# Altium PCB PCB1.PcbDoc
Units mm, origin at the board's own origin, x right, y up, seen from the top; angles counter-clockwise.
Board outline 41 x 58.5 mm, 2 copper layers (Top Layer, Bottom Layer); 36 components, 22 nets, 140 pads, 20 vias.
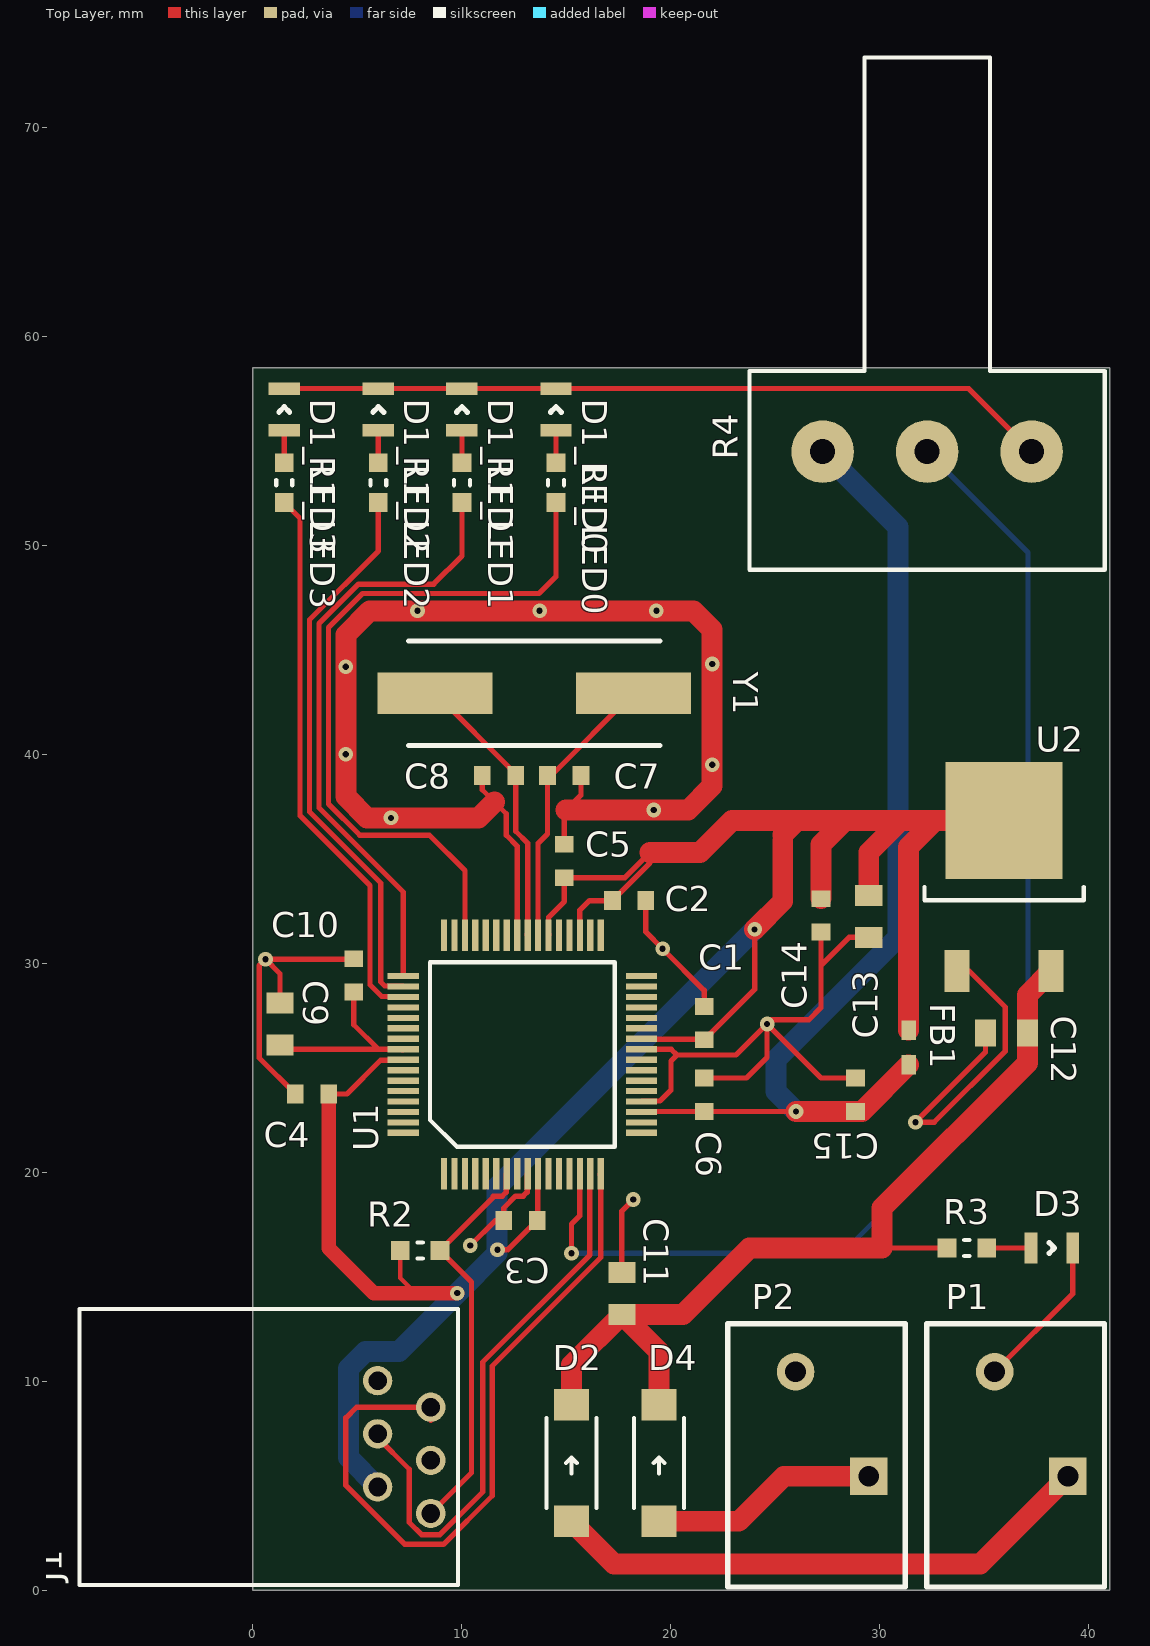
[diagram p0: Top Layer view]
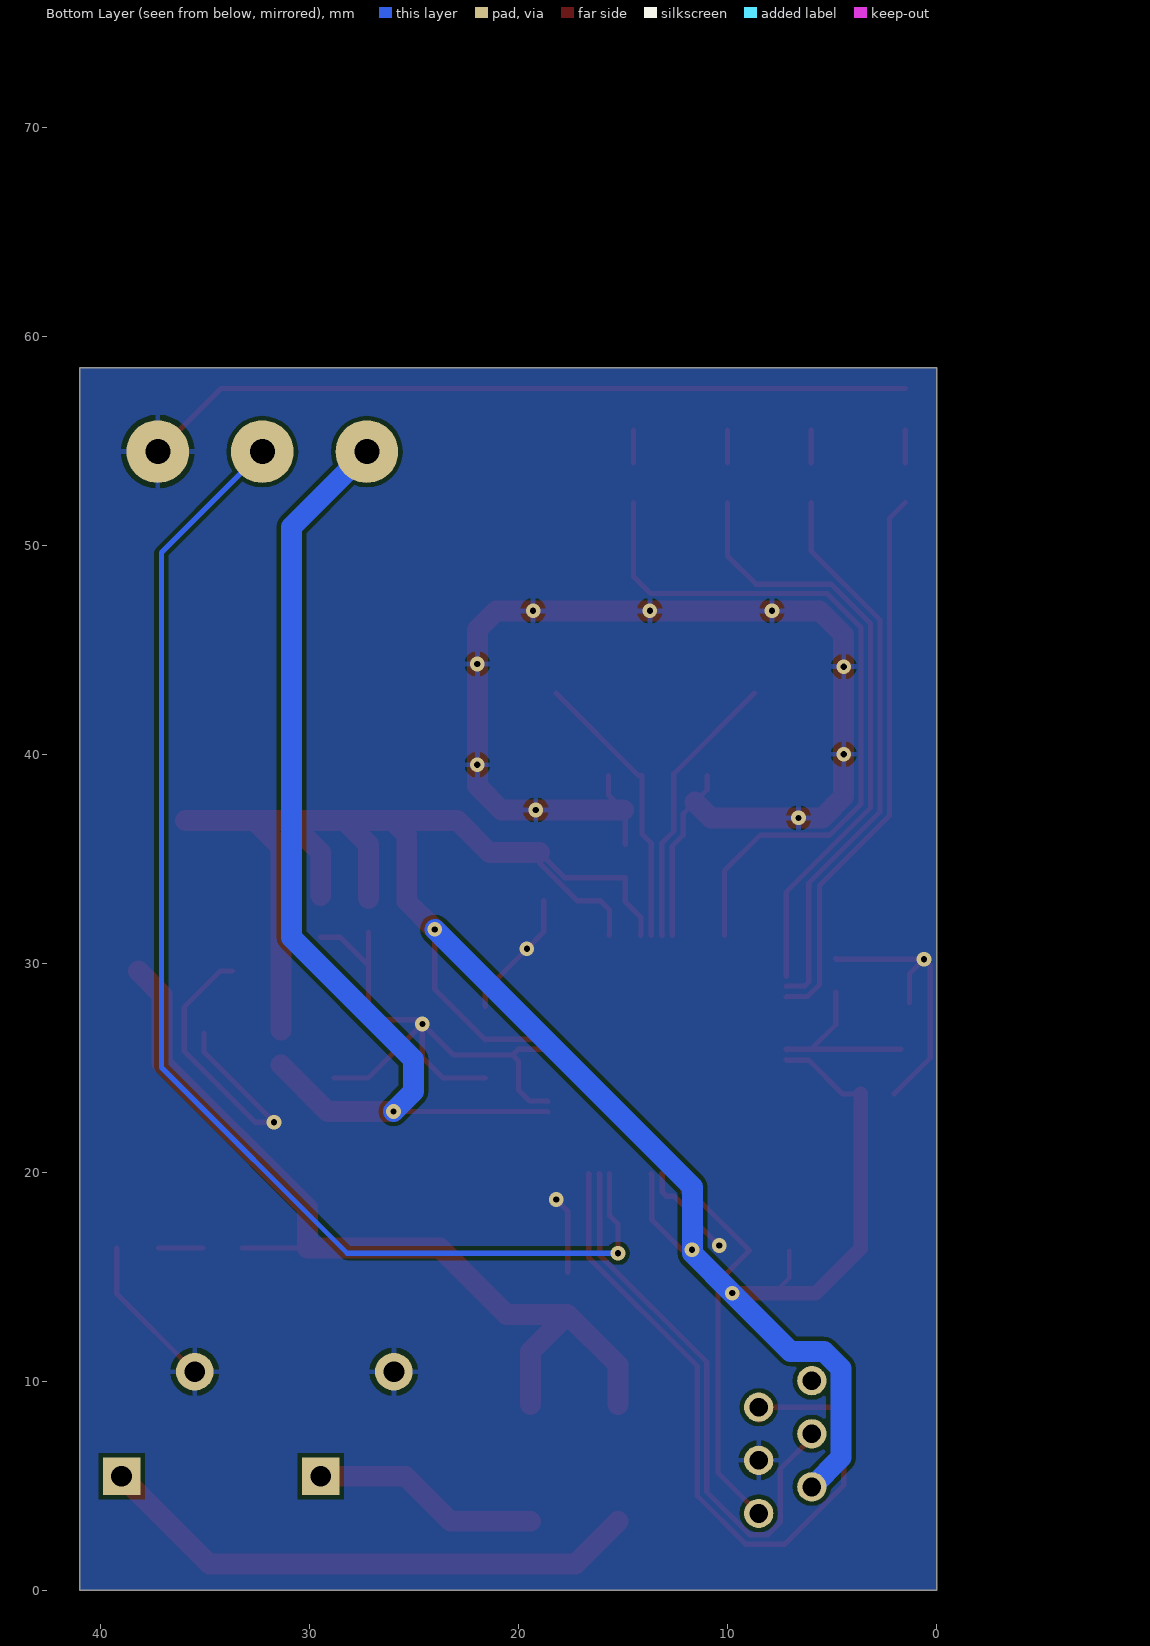
[diagram p1: Bottom Layer view, seen from below]

## Layer stack, top to bottom
Top Solder: solder mask 0.0102, Solder Resist, Dk 3.5
Top Layer: signal copper 0.0356
Dielectric 1: dielectric 0.32, FR-4, Dk 4.8
Bottom Layer: signal copper 0.0356
Bottom Solder: solder mask 0.0102, Solder Resist, Dk 3.5

## Board outline
0,0 41,0 41,58.5 0,58.5

## Design rules (kind name [scope] priority, off if disabled: settings)
Clearance [All] p1: gap=0.2
HoleSize [All] p1: absolutevalues=TRUE maxlimit=5 minlimit=0.3 maxpercent=80.000 minpercent=20.000
PolygonConnect [All] p1: connectstyle=Relief reliefconductorwidth=0.254 reliefentries=4 polygonreliefangle="90 Angle" airgapwidth=0.254
RoutingVias [All] p1: holewidth=0.3 width=0.7 viastyle="Through Hole" minholewidth=0.3 minwidth=0.7 maxholewidth=1 maxwidth=1.4
SilkToBoardRegionClearance [All] p1 off:
SolderMaskExpansion [All] p1: expansion=0.102
UnpouredPolygon [All] p1: allowunpoured=FALSE
Width [All] p1: maxlimit=5 minlimit=0.2 preferedwidth=0.2
27 further rules are at their usual default settings.

## Classes and differential pairs
channel class led: LED0 LED1 LED2 LED3
net class LED[0..3]: LED0 LED1 LED2 LED3
component class TP2: R4
component class POWER: C11 C12 C13 C14 C15 D2 D3 D4 FB1 P1 P2 R3 U2
component class PIC: C1 C2 C3 C4 C5 C6 C7 C8 C9 C10 J1 R2 U1 Y1
component class LED3: D1_LED3 R1_LED3
component class LED2: D1_LED2 R1_LED2
component class LED1: D1_LED1 R1_LED1
component class LED0: D1_LED0 R1_LED0

## Components (designator, comment, footprint, x,y, rotation, side; value= is the part's Value field where it differs from the comment)
C1 "100nF" CAPC1608N 21.59,27.94 r270 top
C2 "100nF" CAPC1608N 18.8,33 r180 top
C3 "100nF" CAPC1608N 12,17.7 r0 top
C4 "100nF" CAPC1608N 2.032,23.749 r0 top
C5 "100nF" CAPC1608N 14.9,35.7 r270 top
C6 "100nF" CAPC1608N 21.59,24.511 r270 top
C7 "20pF" CAPC1608N 14.097,38.989 r0 top
C8 "20pF" CAPC1608N 12.573,38.989 r180 top
C9 "10uF" CAPC2012N 1.3,28.1 r270 top
C10 "1uF" CAPC1608N 4.826,30.226 r270 top
C11 "10uF" CAPC2012N 17.653,13.208 r90 top
C12 "10uF" CAPC2012N 35.052,26.67 r0 top
C13 "10uF" CAPC2012N 29.464,31.242 r90 top
C14 "1uF" CAPC1608N 27.178,31.496 r90 top
C15 "100nF" CAPC1608N 28.829,24.511 r270 top
D1_LED0 "Green Led" "LED 0805" 14.5,56.5 r90 top (schematic designator D1)
D1_LED1 "Green Led" "LED 0805" 10,56.5 r90 top (schematic designator D1)
D1_LED2 "Green Led" "LED 0805" 6,56.5 r90 top (schematic designator D1)
D1_LED3 "Green Led" "LED 0805" 1.5,56.5 r90 top (schematic designator D1)
D2 "GF1A" SMA/DO-214AC_21 15.24,6.096 r90 top
D3 "Green LED" "LED 0805" 38.227,16.383 r0 top
D4 "GF1A" SMA/DO-214AC_21 19.431,6.096 r90 top
FB1 "600r" INDC1608AN 31.369,26.797 r270 top
J1 "CON6" RJ12_90 7.239,6.858 r90 top
P1 "12V Main" PHOENIX_1985195 38.989,5.461 r0 top
P2 "12V Battery" PHOENIX_1985195 29.464,5.461 r0 top
R1_LED0 "Res1" RESC1608N 14.5,53 r270 top (schematic designator R1)
R1_LED1 "Res1" RESC1608N 10,53 r270 top (schematic designator R1)
R1_LED2 "Res1" RESC1608N 6,53 r270 top (schematic designator R1)
R1_LED3 "Res1" RESC1608N 1.5,53 r270 top (schematic designator R1)
R2 "4.7k" RESC1608N 8.001,16.256 r180 top
R3 "470r" RESC1608N 34.163,16.383 r180 top
R4 "1K" PDB181-K415K-102A2 32.258,54.483 r0 top
U1 "PIC32MX764F128H-I/PT" QFP50P1200X1200X120-64 9.144,19.939 r90 top
U2 "AP1117" TD03B_N 35.941,36.83 r0 top
Y1 "8MHz" XTAL139X50X45 13.462,42.926 r0 top

## Footprints (in the part's own frame and the unit in brackets; to place one, negate y for a bottom-side part, rotate by r counter-clockwise, add the part's x,y. Pads: shape width x height; smd on the part's side, far side on the other; paste and mask are expansions set on the pad)
CAPC1608N [mm]
  rect 0.8x0.9 smd: 1(0,0) 2(1.6,0)
CAPC2012N [mm]
  rect 1x1.3 smd: 1(0,0) 2(2,0)
INDC1608AN [mm]
  rect 0.95x0.7 smd: 1(0,0) 2(1.65,0)
"LED 0805" [mm] "Typical INFRARED GaAs LED"
  rect 0.6x1.5 smd: 1(-1,0) 2(1,0)
  silkscreen extent -0.13,-0.25 0.13,0.25
PDB181-K415K-102A2 [mm]
  round 3 hole 1.2: 1(-5,0) 2(0,0) 3(5,0)
  silkscreen extent -8.5,-5.65 8.5,18.85
PHOENIX_1985195 [mm]
  rect 1.8x1.8 hole 1: 1(0,0)
  round 1.8 hole 1: 2(-3.5,5)
  silkscreen extent -6.75,-5.3 1.75,7.3
QFP50P1200X1200X120-64 [mm]
  rect 1.5x0.3 smd: 1(0,0) 2(0,-0.5) 3(0,-1) 4(0,-1.5) 5(0,-2) 6(0,-2.5) 7(0,-3) 8(0,-3.5) 9(0,-4) 10(0,-4.5) 11(0,-5) 12(0,-5.5) 13(0,-6) 14(0,-6.5) 15(0,-7) 16(0,-7.5) 33(11.4,-7.5) 34(11.4,-7) 35(11.4,-6.5) 36(11.4,-6) 37(11.4,-5.5) 38(11.4,-5) 39(11.4,-4.5) 40(11.4,-4) 41(11.4,-3.5) 42(11.4,-3) 43(11.4,-2.5) 44(11.4,-2) 45(11.4,-1.5) 46(11.4,-1) 47(11.4,-0.5) 48(11.4,0)
  rect 0.3x1.5 smd: 17(1.95,-9.45) 18(2.45,-9.45) 19(2.95,-9.45) 20(3.45,-9.45) 21(3.95,-9.45) 22(4.45,-9.45) 23(4.95,-9.45) 24(5.45,-9.45) 25(5.95,-9.45) 26(6.45,-9.45) 27(6.95,-9.45) 28(7.45,-9.45) 29(7.95,-9.45) 30(8.45,-9.45) 31(8.95,-9.45) 32(9.45,-9.45) 49(9.45,1.95) 50(8.95,1.95) 51(8.45,1.95) 52(7.95,1.95) 53(7.45,1.95) 54(6.95,1.95) 55(6.45,1.95) 56(5.95,1.95) 57(5.45,1.95) 58(4.95,1.95) 59(4.45,1.95) 60(3.95,1.95) 61(3.45,1.95) 62(2.95,1.95) 63(2.45,1.95) 64(1.95,1.95)
  silkscreen extent 1.28,-8.16 10.11,0.67
RESC1608N [mm]
  rect 0.9x0.9 smd: 1(-0.95,0) 2(0.95,0)
  silkscreen extent -0.13,-0.38 0.13,0.38
RJ12_90 [mm] "RJ11"
  round 1.4 hole 0.9: 1(-3.175,-1.27) 2(-1.905,1.27) 3(-0.635,-1.27) 4(0.635,1.27) 5(1.905,-1.27) 6(3.175,1.27)
  silkscreen extent -6.6,-2.57 6.6,15.53
SMA/DO-214AC_21 [mm]
  rect 1.52x1.68 smd: 1(-2.79,0) 2(2.79,0)
  silkscreen extent -2.15,-1.2 2.15,1.2
TD03B_N [mm] "1A LDO, 18V input, DPAK"
  rect 1.2x2 smd: 1(-2.25,-7.2) 3(2.25,-7.2)
  rect 5.6x5.6 smd: 4(0,0)
  silkscreen extent -3.81,-3.81 3.81,-3.17
XTAL139X50X45 [mm] "Crystal Oscillator"
  rect 5.5x2 smd: 1(-4.75,0) 2(4.75,0)
  silkscreen extent -6,-2.5 6,2.5

## Part data
C1 C2 C3 C4 C5 C6 C7 C8 C9 C10 C11 C12 C13 C14 C15: library part Cap, "Capacitor"
D1_LED0 D1_LED1 D1_LED2 D1_LED3 D3: library part LED0, "Typical INFRARED GaAs LED"
D2 D4: library part Diode, "Default Diode"
FB1: library part Inductor, "Inductor"
P1 P2: library part "Header 2", "Header, 2-Pin"
R1_LED0 R1_LED1 R1_LED2 R1_LED3: "Resistor"
R2 R3: library part Res1, "Resistor"
R4: library part RPot, "Potentiometer"
U1: library part PIC32MX764F128H, "PIC32MX764F128H"
U2: "1A LDO, 18V input, DPAK"
Y1: library part XTAL, "Crystal Oscillator"

## Via types
v1: diameter 0.7, hole 0.3, Top Layer to Bottom Layer, 20 vias

## Nets (pads, with @x,y where several pads share a name; then routed paths per layer and width w, separated by ;. In a path a pad name is that pad's centre, name@x,y a point inside that pad or via, vN(x,y) a via of type N, cw(c..) or ccw(c..) an arc to the next point about the centre after c; other vN are vias at no path point)
ALIM: D2.1 P1.1 | length 26.3
  Top Layer w1: D2.1 17.276,1.27 34.798,1.27 P1.1
BATTERY: D4.1 P2.1 | length 10.9
  Top Layer w1: D4.1 23.245,3.306 25.4,5.461 P2.1
GND: C1.1 C2.1 C3.1 C4.1 C5.1 C6.1 C7.2 C8.2 C9.1 C10.1 C11.2 C12.1 C13.1 C14.1 C15.1 D1_LED0.2 D1_LED1.2 D1_LED2.2 D1_LED3.2 D3.2 J1.3 P1.2 P2.2 R4.3 U1.9 U1.20 U1.25 U1.41 U2.1 | length 180.7
  Top Layer w0.254: C9.1 1.3,29.5 v1(0.6,30.2) ; D1_LED3.2 D1_LED2.2 D1_LED1.2 D1_LED0.2 34.241,57.5 R4.3 ; C4.1 0.3,25.481 0.3,29.9 v1(0.6,30.2) ; C10.1 4.8,30.2 v1(0.6,30.2) ; v1(10.4,16.5) 11.6,17.7 C3.1 12,18.291 12.571,18.862 12.929,18.862 13.121,19.054 13.121,19.916 U1.9 ; C8.2 10.973,38.303 11.557,37.719 12.119,37.157 12.119,36.134 12.644,35.609 U1.41 ; C5.1 14.9,37.252 14.986,37.338 15.697,38.049 C7.2 ; 16.7,37.338 16.764,37.274 ; C11.2 17.653,18.153 v1(18.2,18.7) ; U1.20 18.617,23.412 19.479,23.412 20,23.933 20,25.326 20.287,25.613 ; U1.25 20.011,25.889 20.287,25.613 ; C2.1 18.8,31.5 v1(19.6,30.7) 21.59,28.71 C1.1 ; C6.1 23.611,24.511 24.6,25.5 v1(24.6,27.1) ; C14.1 27.178,29.9 ; C15.1 27.189,24.511 v1(24.6,27.1) ; C13.1 28.52,31.242 27.178,29.9 ; U2.1 34.27,29.63 36,27.9 36,25.8 32.6,22.4 v1(31.7,22.4) 35.052,25.752 C12.1 ; P1.2 39.227,14.199 D3.2 ; 20.287,25.613 23.113,25.613 v1(24.6,27.1) ; v1(24.6,27.1) 24.8,27.3 26.6,27.3 27.178,27.878 27.178,29.9
  Top Layer w1: 11.557,37.719 10.795,36.957 5.461,36.957 4.445,37.973 4.445,45.72 5.588,46.863 21.082,46.863 21.971,45.974 21.971,38.481 20.828,37.338 v1(19.177,37.338) 16.7,37.338 14.986,37.338
  other v1: 6.604,36.957 21.971,39.497 4.445,40.005 4.445,44.196 21.971,44.323 7.874,46.863 13.716,46.863 19.304,46.863
LED0: R1_LED0.2 U1.46 | length 34.8
  Top Layer w0.254: U1.46 10.144,34.433 8.447,36.13 5.118,36.13 3.618,37.63 3.618,46.063 5.245,47.69 13.69,47.69 14.5,48.5 R1_LED0.2
LED1: R1_LED1.2 U1.49 | length 29.3
  Top Layer w0.254: U1.49 7.194,33.412 3.164,37.442 3.164,46.251 5.057,48.144 8.647,48.144 10,49.497 R1_LED1.2
LED2: R1_LED2.2 U1.50 | length 26.9
  Top Layer w0.254: R1_LED2.2 6,49.729 2.71,46.439 2.71,37.254 6.117,33.847 6.117,29.104 6.309,28.912 7.171,28.912 U1.50
LED3: R1_LED3.2 U1.51 | length 26.6
  Top Layer w0.254: R1_LED3.2 2.256,51.294 2.256,37.066 5.603,33.719 5.603,28.975 6.167,28.412 7.171,28.412 U1.51
MCLR: J1.1 R2.1 U1.7 | length 19.3
  Top Layer w0.254: J1.1 10.456,5.63 10.456,14.751 R2.1 11.496,18.801 11.496,18.862 11.929,18.862 12.121,19.054 12.121,19.916 U1.7
NetC9_2: C9.2 C10.2 U1.56 | length 8.8
  Top Layer w0.254: C9.2@1.7,25.9 1.711,25.889 6,25.889 ; C10.2 4.826,27.063 6,25.889 ; U1.56@7.125,25.912 U1.56@7.148,25.889 ; U1.56@7.171,25.866 U1.56@7.148,25.889 ; U1.56 U1.56@7.148,25.889 ; 6,25.889 U1.56@7.148,25.889
NetD1_LED0_1: D1_LED0.1 R1_LED0.1 | length 1.5
  Top Layer w0.254: R1_LED0.1 D1_LED0.1
NetD1_LED1_1: D1_LED1.1 R1_LED1.1 | length 1.5
  Top Layer w0.254: R1_LED1.1 D1_LED1.1
NetD1_LED2_1: D1_LED2.1 R1_LED2.1 | length 1.5
  Top Layer w0.254: R1_LED2.1 D1_LED2.1
NetD1_LED3_1: D1_LED3.1 R1_LED3.1 | length 1.5
  Top Layer w0.254: R1_LED3.1 D1_LED3.1
NetD3_1: D3.1 R3.1 | length 2.1
  Top Layer w0.254: R3.1 D3.1
NetR4_2: R4.2 U1.14 | length 61
  Top Layer w0.254: v1(15.24,16.129) 15.24,17.526 15.644,17.93 U1.14
  Bottom Layer w0.254: v1(15.24,16.129) 28.194,16.129 37.084,25.019 37.084,49.657 R4.2
PGC: J1.4 U1.15 | length 26.8
  Top Layer w0.254: J1.4 5.969,7.311 7.482,5.798 7.482,3.258 8.084,2.656 8.934,2.656 10.995,4.717 10.995,10.927 16.121,16.053 16.121,19.916 U1.15
PGD: J1.5 U1.16 | length 34.9
  Top Layer w0.254: J1.5@8.509,8.128 J1.5 4.953,8.763 4.445,8.255 4.445,5.025 7.268,2.202 9.122,2.202 11.449,4.529 11.449,10.739 16.644,15.934 U1.16 U1.16@16.621,19.916
V3P3: C1.2 C2.2 C3.2 C4.2 C5.2 C13.2 C14.2 FB1.1 J1.2 R2.2 U1.10 U1.26 U1.35 U1.38 U1.57 U2.4 | length 127.6
  Top Layer w0.2: R2.2 7.051,14.951 7.778,14.224
  Top Layer w0.254: C4.2 4.5,23.749 6.117,25.366 7.171,25.366 U1.57 ; v1(11.7,16.3) 12.2,16.3 C3.2 13.621,17.721 13.621,19.916 U1.10 ; U1.38@14.167,31.362 U1.38 14.144,32.201 14.9,32.957 C5.2 17.8,34.1 19,35.3 19,34.8 C2.2 16.1,33 15.644,32.544 U1.35 U1.35@15.667,31.362 ; U1.26 18.617,26.366 21.59,26.366 C1.2 24.003,28.753 v1(24.003,31.623) ; 25.349,35.865 25.349,36.144
  Top Layer w0.7: C4.2 3.632,16.368 5.776,14.224 7.778,14.224 v1(9.779,14.224)
  Top Layer w1: 19,35.3 21.4,35.3 22.93,36.83 26.035,36.83 ; v1(24.003,31.623) 25.349,32.969 25.349,35.865 ; 25.349,36.144 26.035,36.83 ; C14.2 27.178,35.687 28.321,36.83 ; C13.2 29.464,35.306 30.988,36.83 ; FB1.1 31.369,35.56 32.639,36.83 ; U2.4 32.639,36.83 ; 26.035,36.83 28.321,36.83 ; 28.321,36.83 30.988,36.83 ; 30.988,36.83 32.639,36.83
  Bottom Layer w1: J1.2 4.572,6.35 4.572,6.907 4.569,6.91 4.569,10.613 5.389,11.433 6.988,11.433 v1(9.779,14.224) 11.684,16.129 11.684,19.304 v1(24.003,31.623)
V3P3A: C6.2 C15.2 FB1.2 R4.1 U1.19 | length 50.7
  Top Layer w0.254: U1.19 18.616,22.911 C6.2 v1(25.984,22.911) ; R4.1 R4.1@28.068,53.673
  Top Layer w1: v1(25.984,22.911) C15.2 29.133,22.911 FB1.2
  Bottom Layer w1: v1(25.984,22.911) 25.019,23.876 25.019,25.4 30.861,31.242 30.861,50.88 R4.1
V5: C11.1 C12.2 D2.2 D4.2 R3.2 U2.3 | length 43.9
  Top Layer w0.254: 30.099,16.383 R3.2
  Top Layer w1: D2.2 15.24,10.795 C11.1 ; D4.2 19.431,11.43 C11.1 ; U2.3 37.052,28.491 C12.2 37.052,25.241 30.099,18.288 30.099,16.383 23.749,16.383 20.574,13.208 C11.1
X1: C7.1 U1.39 Y1.2 | length 13.6
  Top Layer w0.254: U1.39@13.667,31.362 U1.39 13.644,35.742 14.097,36.195 C7.1 14.275,38.989 Y1.2
X2: C8.1 U1.40 Y1.1 | length 13.5
  Top Layer w0.254: Y1.1 12.573,39.065 C8.1 12.573,36.322 13.144,35.751 U1.40 U1.40@13.121,31.362
pads on no net: J1.6 U1.1 U1.2 U1.3 U1.4 U1.5 U1.6 U1.8 U1.11 U1.12 U1.13 U1.17 U1.18 U1.21 U1.22 U1.23 U1.24 U1.27 U1.28 U1.29 U1.30 U1.31 U1.32 U1.33 U1.34 U1.36 U1.37 U1.42 U1.43 U1.44 U1.45 U1.47 U1.48 U1.52 U1.53 U1.54 U1.55 U1.58 U1.59 U1.60 U1.61 U1.62 U1.63 U1.64

## Polygon pours and split planes (outlines as drawn)
GND on Bottom Layer "Top Layer-No Net" (solid, remove dead copper, pour order 2): 0,0 41,0 41,58.5 0,58.5 0,0

## Silkscreen, mask and mechanical layers (free items; w line width, h text height)
Board Outline:
  the board outline again, w0.2